# Altium PCB SAMD21_Base_Layout.PcbDoc
Units mm, origin at the board's own origin, x right, y up, seen from the top; angles counter-clockwise.
Board outline 152.4 x 101.6 mm, 2 copper layers (Top Layer, Bottom Layer); 27 components, 25 nets, 137 pads, 22 vias.
Unrouted connection lines stored in the file: 27.
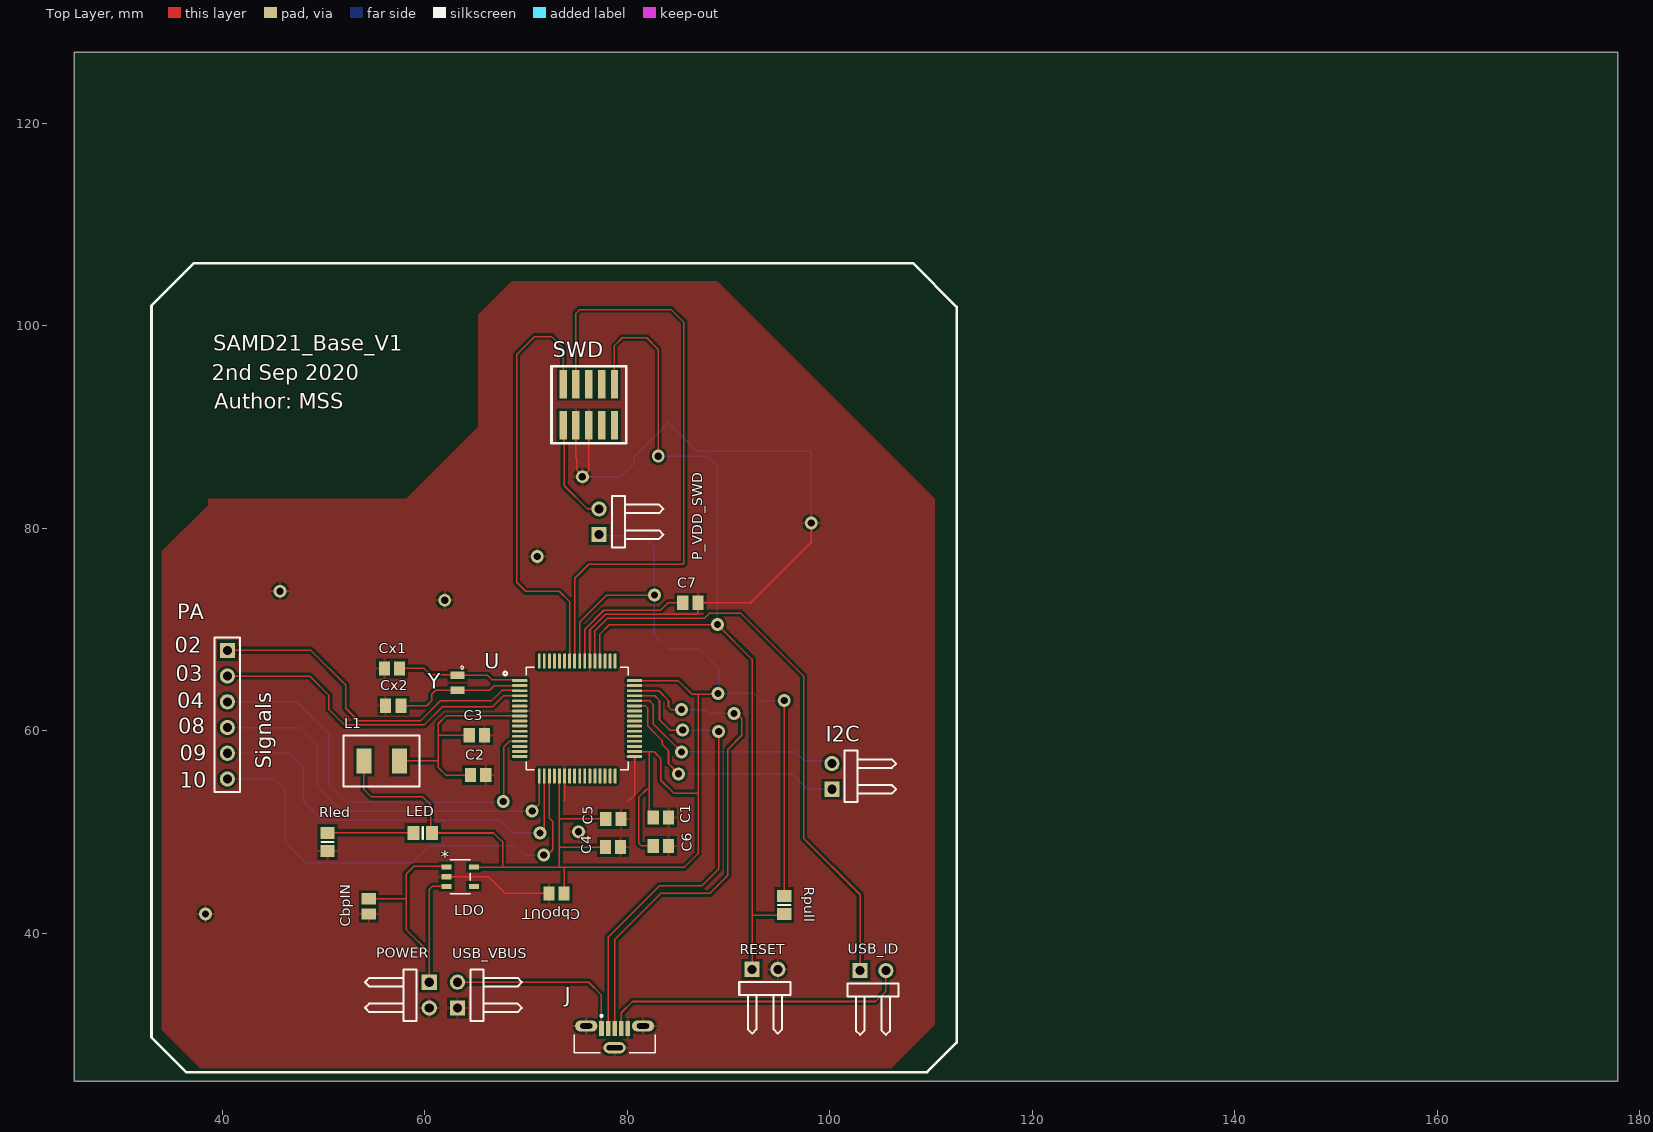
[diagram p0: Top Layer view]
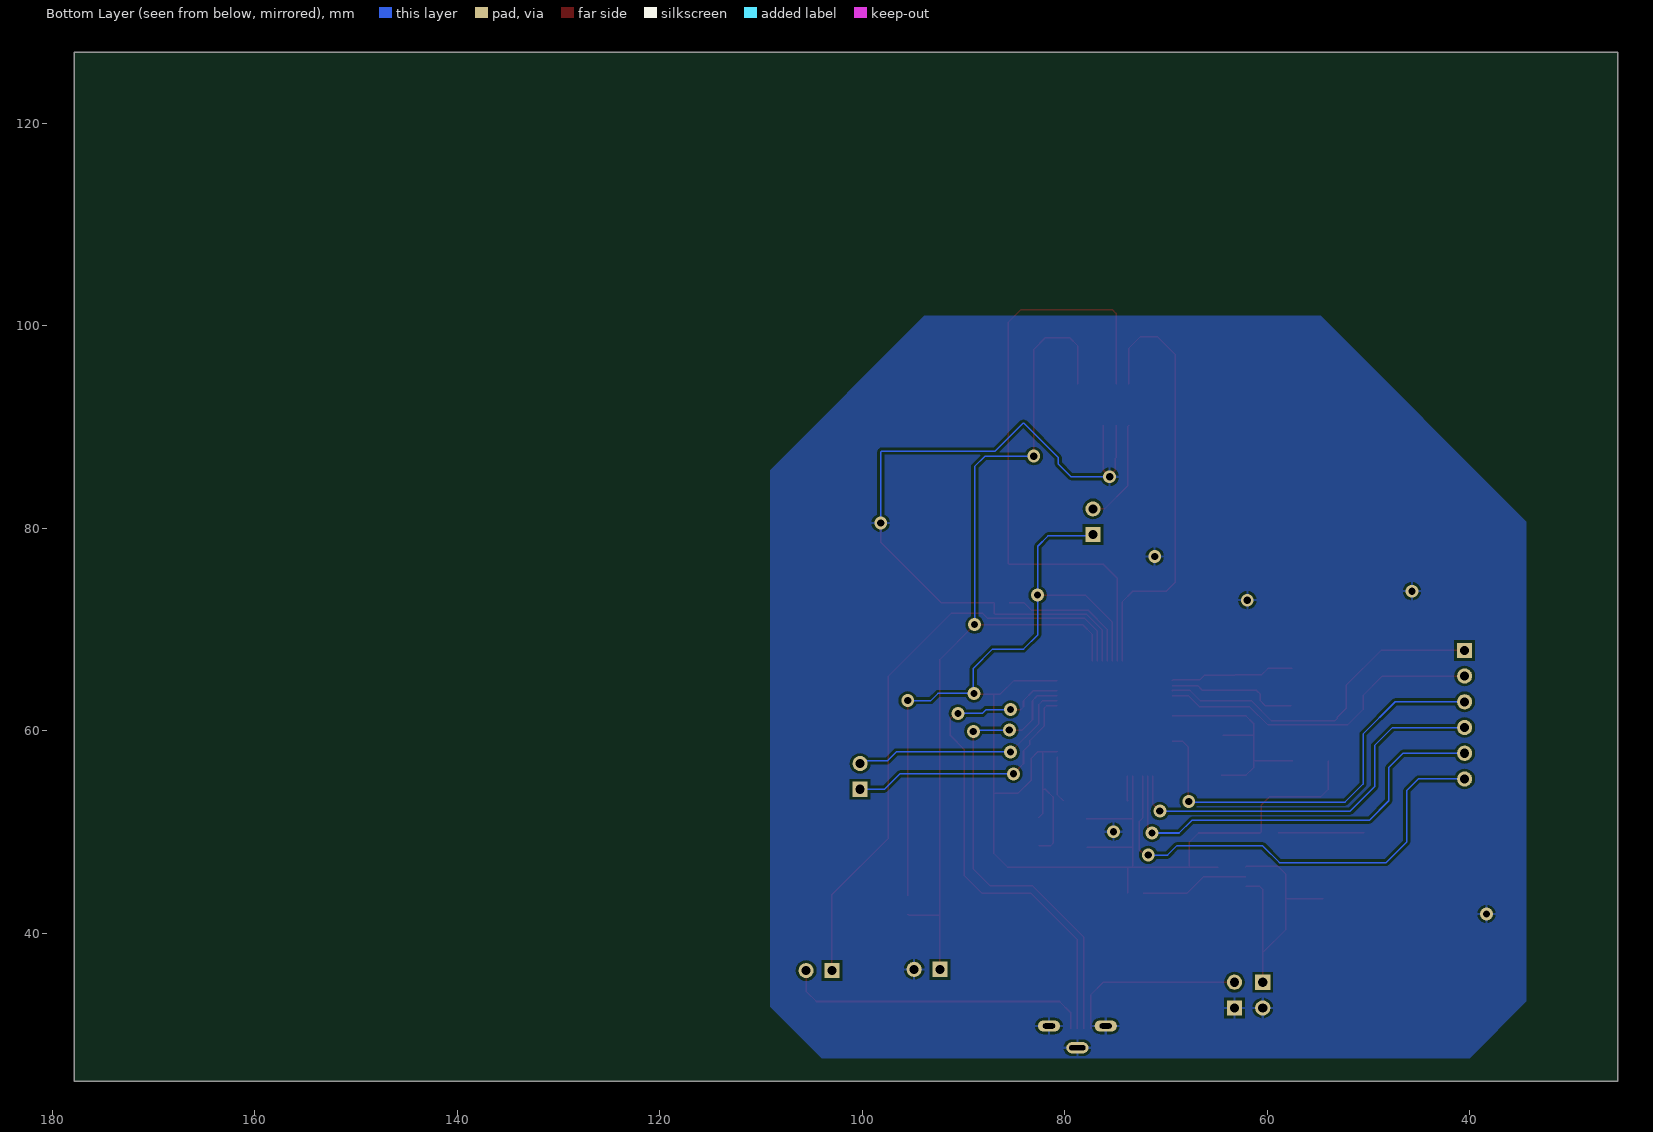
[diagram p1: Bottom Layer view, seen from below]

## Layer stack, top to bottom
Top Solder: solder mask 0.0102, Solder Resist, Dk 3.5
Top Layer: signal copper 0.0356
Dielectric 1: dielectric 0.32, FR-4, Dk 4.8
Bottom Layer: signal copper 0.0356
Bottom Solder: solder mask 0.0102, Solder Resist, Dk 3.5

## Board outline
25.4,25.4 177.8,25.4 177.8,127 25.4,127

## Design rules (kind name [scope] priority, off if disabled: settings)
Clearance [All] p1: gap=0.254 ignorepadtopadclearanceinfootprint=FALSE except(0: Arc-Hole Track-Hole SMDPad-Hole THPad-Hole Via-Hole Fill-Hole Poly-Hole Region-Hole Text-Hole)
PolygonConnect [All] p1: connectstyle=Relief reliefconductorwidth=0.254 reliefentries=4 polygonreliefangle="90 Angle" airgapwidth=0.254
RoomDefinition SAMD21_Base_schematic [InComponentClass('SAMD21_Base_schematic')] p1: confinementstyle=ConfineIn formatcopy=TRUE lockcomponents=FALSE outline 29.083,25.527 116.967,25.527 116.967,109.22 29.083,109.22
RoutingVias [All] p1: holewidth=0.711 width=1.27 viastyle="Through Hole" minholewidth=0.711 minwidth=1.27 maxholewidth=0.711 maxwidth=1.27
SolderMaskExpansion [All] p1: expansion=0.102 istentingtop=FALSE
Width [All] p1: maxlimit=0.254 minlimit=0.1 preferedwidth=0.254
30 further rules are at their usual default settings.

## Components (designator, comment, footprint, x,y, rotation, side; value= is the part's Value field where it differs from the comment)
C1 "Cap Pol3" C0805 83.324,51.435 r0 top value=10uF
C2 "Cap Pol3" C0805 65.278,55.626 r0 top value=100nF
C3 "Cap Pol3" C0805 65.151,59.563 r0 top value=10uF
C4 "Cap Pol3" C0805 78.601,48.514 r0 top value=100nF
C5 "Cap Pol3" C0805 78.625,51.308 r0 top value=100pF
C6 "Cap Pol3" C0805 83.312,48.641 r0 top value=100nF
C7 "Cap Pol3" C0805 86.233,72.644 r0 top value=1uF
CbpIN "Cap Pol3" C0805 54.483,42.672 r270 top value=1uF
CbpOUT "Cap Pol3" C0805 73.013,43.942 r180 top value=1uF
Cx1 "Cap Pol3" C0805 56.769,66.167 r180 top value=25pF
Cx2 "Cap Pol3" C0805 56.896,62.484 r180 top value=25pF
I2C "Header 2H" HDR1X2H 100.203,54.229 r90 top
J "1051330001" MOLEX_1051330001 78.755,30.857 r0 top
L1 "SRP4012TA-100M" Inductor 55.753,57.023 r180 top
LDO "AP2112K-3.3TRG1" SOT_RG1_DIO 63.5,45.593 r0 top
LED "Res Thermal" 6-0805_N 59.806,49.911 r180 top
P_VDD_SWD "Header 2H" HDR1X2H 77.216,79.375 r90 top
POWER "Header 2H" HDR1X2H 60.452,35.179 r270 top
RESET "Header 2H" HDR1X2H 92.329,36.449 r0 top
Rled "Res Thermal" 6-0805_N 50.408,49.022 r270 top
Rpull "Res Thermal" 6-0805_N 95.504,42.799 r270 top
Signals "Header 6" HDR1X6 40.513,67.945 r270 top
SWD "FTSH-105-01-XXX-DV-K" FTSH-105-01-XXX-DV-K 76.2,92.202 r0 top
U "ATSAMD21J18A-AU" QFP80P1600X1600X120-64N 75.057,61.214 r0 top
USB_ID "Header 2H" HDR1X2H 102.997,36.322 r0 top
USB_VBUS "Header 2H" HDR1X2H 63.246,32.639 r90 top
Y "ABS06-32.768KHZ-T" XTAL_ABS06-32.768KHZ-T 63.246,64.738 r270 top

## Footprints (in the part's own frame and the unit in brackets; to place one, negate y for a bottom-side part, rotate by r counter-clockwise, add the part's x,y. Pads: shape width x height; smd on the part's side, far side on the other; paste and mask are expansions set on the pad)
6-0805_N [mm] "Chip Resistor, Body 2.0x1.2mm, IPC Medium Density"
  rect 1.2x1.4 smd: 1(-0.9,0) 2(0.9,0)
  silkscreen extent 0,-0.6 0,0.6, body extent -1.07,-0.7 1.07,0.7, height 0.7
C0805 [mm] "Chip Capacitor, Body 2.0x1.3mm, IPC High Density"
  rect 1.1x1.4 smd: 1(-0.75,0) 2(0.75,0)
  body extent -1.1,-0.72 1.1,0.72, height 1.4
FTSH-105-01-XXX-DV-K [mil]
  rect 29x110 smd mask+2: 1(-100,-80) 2(-100,80) 3(-50,-80) 4(-50,80) 5(0,-80) 6(0,80) 7(50,-80) 8(50,80) 9(100,-80) 10(100,80)
  silkscreen extent -145,-150 145,150
HDR1X2H [mm] "Connector; Header; 2 Position; Right Angle"
  rect 1.5x1.5 hole 0.9: 1(0,0)
  round 1.5 hole 0.9: 2(2.54,0)
  silkscreen extent -1.27,-6.35 3.81,-1.27
HDR1X6 [mm] "Connector; Header; 6 Position"
  rect 1.5x1.5 hole 0.9: 1(0,0)
  round 1.5 hole 0.9: 2(2.54,0) 3(5.08,0) 4(7.62,0) 5(10.16,0) 6(12.7,0)
  silkscreen extent -1.27,-1.27 13.97,1.27
Inductor [mm]
  rect 1.5x2.5 smd: 1(-1.75,0) 2(1.75,0)
  silkscreen extent -3.75,-2.5 3.75,2.5
MOLEX_1051330001 [mm]
  rect 0.45x1.5 smd: 1(-1.3,-0.25) 2(-0.65,-0.25) 3(0,-0.25) 4(0.65,-0.25) 5(1.3,-0.25)
  oval 2.2x1.1 hole 0.5 slot 1.2 at 0 deg: S1(-2.8,0) S2(2.8,0)
  oval 2.2x1.1 hole 0.5 slot 1.6 at 0 deg: S3(0,-2.15)
  silkscreen extent -4,-2.65 4,1.1
QFP80P1600X1600X120-64N [mm]
  rrect50% 1.49x0.28 smd: 1(-5.67,3.75) 2(-5.67,3.25) 3(-5.67,2.75) 4(-5.67,2.25) 5(-5.67,1.75) 6(-5.67,1.25) 7(-5.67,0.75) 8(-5.67,0.25) 9(-5.67,-0.25) 10(-5.67,-0.75) 11(-5.67,-1.25) 12(-5.67,-1.75) 13(-5.67,-2.25) 14(-5.67,-2.75) 15(-5.67,-3.25) 16(-5.67,-3.75) 33(5.67,-3.75) 34(5.67,-3.25) 35(5.67,-2.75) 36(5.67,-2.25) 37(5.67,-1.75) 38(5.67,-1.25) 39(5.67,-0.75) 40(5.67,-0.25) 41(5.67,0.25) 42(5.67,0.75) 43(5.67,1.25) 44(5.67,1.75) 45(5.67,2.25) 46(5.67,2.75) 47(5.67,3.25) 48(5.67,3.75)
  rrect50% 0.28x1.49 smd: 17(-3.75,-5.67) 18(-3.25,-5.67) 19(-2.75,-5.67) 20(-2.25,-5.67) 21(-1.75,-5.67) 22(-1.25,-5.67) 23(-0.75,-5.67) 24(-0.25,-5.67) 25(0.25,-5.67) 26(0.75,-5.67) 27(1.25,-5.67) 28(1.75,-5.67) 29(2.25,-5.67) 30(2.75,-5.67) 31(3.25,-5.67) 32(3.75,-5.67) 49(3.75,5.67) 50(3.25,5.67) 51(2.75,5.67) 52(2.25,5.67) 53(1.75,5.67) 54(1.25,5.67) 55(0.75,5.67) 56(0.25,5.67) 57(-0.25,5.67) 58(-0.75,5.67) 59(-1.25,5.67) 60(-1.75,5.67) 61(-2.25,5.67) 62(-2.75,5.67) 63(-3.25,5.67) 64(-3.75,5.67)
  silkscreen extent -7.28,-5.05 5.05,5.05
SOT_RG1_DIO [mil]
  rect 39.5x20 smd paste+0 mask+0: 1(-53.25,37.4) 2(-53.25,0) 3(-53.25,-37.4) 4(53.25,-37.4) 5(53.25,37.4)
  silkscreen extent -38,-66 38,66, body extent 0,0 10,10, height 10
XTAL_ABS06-32.768KHZ-T [mm]
  rect 0.75x1.4 smd: 1(-0.73,0) 2(0.73,0)
  silkscreen extent -1.64,0.31 -1.36,0.59

## Part data
C1 C2 C3 C4 C5 C6 C7 CbpIN CbpOUT Cx1 Cx2: "Polarized Capacitor (Surface Mount)", LatestRevisionDate=29-May-2009, LatestRevisionNote="IPC-7351 Footprint Added.", PackageDescription="Chip Capacitor", PackageReference=C0805, Published=8-Jun-2000, Publisher="Altium Limited"
I2C P_VDD_SWD POWER RESET USB_ID USB_VBUS: "Header, 2-Pin, Right Angle", LatestRevisionDate=17-Jul-2002, LatestRevisionNote="Re-released for DXP Platform.", Publisher="Altium Limited"
J: "USB Connectors MICRO USB B RECPT VERTICAL", Package=None, Availability=Unavailable, MF=Molex, MP=105133-0001, Price=None, SnapEDA_Link=https://www.snapeda.com/parts/105133-0001/Molex/view-part/4775133/?ref=snap
L1: "Inductor"
LDO: "No Description Available", Built_By=EMA_Matt, Copyright="Copyright (C) 2018 Accelerated Designs. All rights reserved", Manufacturer_Part_Number=AP2112K-3.3TRG1, RefDes=RefDes, SourceLibrary=Diodes_Inc_2019-12-05, Type=DEV, Vendor="Diodes Inc"
LED Rled Rpull: "Thermistor", Code_IPC=RESC2012, LatestRevisionDate=29-May-2009, LatestRevisionNote="IPC-7351 Footprint Added.", PackageDescription="Chip Resistor 0805 Case Size", PackageReference=6-0805, PackageVersion=Mar-2003, Published=24-Mar-1999, Publisher="Altium Limited"
Signals: "Header, 6-Pin", LatestRevisionDate=17-Jul-2002, LatestRevisionNote="Re-released for DXP Platform.", Publisher="Altium Limited"
SWD: "TERMINAL STRIP, .050\"(1.27mm) PITCH, 10 PINS, KEYED", MANUFACTURER=SAMTEC, CREATED="November 30, 2016 - Wendy Xin", PCB DECAL=FTSH-105-01-XXX-DV-K
U: "ARMÂ® CortexÂ®-M0+ SAM D21J Microcontroller IC 32-Bit 48MHz 256KB _256K x 8_ FLASH 64-TQFP _10x10_", Package="TQFP-64 Microchip", Availability=Unavailable, MF=Microchip, MP=ATSAMD21J18A-AU, Price=None, SnapEDA_Link=https://www.snapeda.com/parts/ATSAMD21J18A-AU/Microchip/view-part/588919/?ref=snap
Y: "32.768kHz Â±20ppm Crystal 12.5pF 90 kOhms 2-SMD, No Lead", Package="SMD-2 Abracon", Availability=Unavailable, DigiKey-Purchase-URL=https://snapeda.com/shop?store=DigiKey&id=108994, MF=Abracon, MP=ABS06-32.768KHZ-T, Price=None, SnapEDA_Link=https://www.snapeda.com/parts/ABS06-32.768KHZ-T/Abracon%20LLC/view-part/108994/?ref=snap

## Via types
v1: diameter 1.27, hole 0.711, Top Layer to Bottom Layer, 22 vias

## Nets (pads, with @x,y where several pads share a name; then routed paths per layer and width w, separated by ;. In a path a pad name is that pad's centre, name@x,y a point inside that pad or via, vN(x,y) a via of type N, cw(c..) or ccw(c..) an arc to the next point about the centre after c; other vN are vias at no path point)
GND: C1.2 C2.2 C3.2 C4.2 C5.2 C6.2 C7.2 CbpIN.2 CbpOUT.2 Cx1.2 Cx2.2 J.5 J.S1 J.S2 J.S3 LDO.2 POWER.2 RESET.2 Rled.2 SWD.3 SWD.5 U.7 U.22 U.33 U.47 U.54 USB_VBUS.1 | length 93
  Top Layer w0.15: LDO.2 66.294,45.593 67.945,43.942 CbpOUT.2 ; 73.787,53.086 73.807,53.106 U.22 ; SWD.3 74.93,86.956 75.018,86.868 75.018,85.759 75.565,85.212 v1(75.565,85.09) 76.2,85.725 SWD.5 ; U.54 76.307,69.957 77.851,71.501 86.895,71.501 86.983,71.589 C7.2 92.202,72.644 98.171,78.613 v1(98.171,80.518) ; 80.137,53.086 80.727,53.676 U.33
  Bottom Layer w0.15: v1(75.565,85.09) 79.375,85.09 80.645,86.36 80.645,86.995 84.012,90.362 84.136,90.362 86.868,87.63 98.083,87.63 98.171,87.542 v1(98.171,80.518)
  other v1: 38.354,41.91 75.184,50.038 61.976,72.898 45.72,73.787 71.12,77.216
NetC2_1: C2.1 C3.1 L1.1 U.8 | length 23.1
  Top Layer w0.15: L1.1 61.341,57.023 ; C3.1 61.341,59.563 ; C2.1 62.103,55.626 61.341,56.388 61.341,57.023 ; U.8 69.383,61.468 62.103,61.468 61.341,60.706 61.341,59.563 ; 61.341,57.023 61.341,59.563
NetC7_1: C7.1 U.55 | length 13.9
  Top Layer w0.15: U.55 75.819,66.896 75.819,70.04 77.684,71.905 83.294,71.905 84.033,72.644 C7.1
NetCbpIN_1: CbpIN.1 LDO.1 LDO.3 POWER.1 | length 27.7
  Top Layer w0.15: CbpIN.1 58.166,43.422 ; POWER.1 60.452,38.1 ; LDO.3 60.772,44.643 60.452,44.323 60.452,38.1 ; LDO.1 62.081,46.609 58.928,46.609 58.166,45.847 58.166,43.422 ; 58.166,43.422 58.166,40.386 60.452,38.1
NetCx1_1: Cx1.1 U.1 Y.1 | length 12.4
  Top Layer w0.15: Cx1.1 59.944,66.167 60.579,65.532 63.182,65.532 Y.1 66.231,65.468 66.675,65.024 69.327,65.024 U.1
NetCx2_1: Cx2.1 U.2 Y.2 | length 12.9
  Top Layer w0.15: Cx2.1 60.198,62.484 60.706,62.992 60.706,63.627 61.087,64.008 Y.2 66.421,64.008 66.877,64.464 U.2
NetI2C_1: I2C.1 U.43 | length 25.5
  Top Layer w0.15: U.43 81.808,62.464 82.042,62.23 82.042,60.452 83.439,59.055 83.439,58.674 84.074,58.039 84.074,56.769 84.582,56.261 84.582,55.841 84.67,55.753 v1(85.07,55.753) v1@85.471,55.753
  Bottom Layer w0.15: v1(85.07,55.753) 96.266,55.753 97.79,54.229 I2C.1
NetI2C_2: I2C.2 U.44 | length 23.2
  Top Layer w0.15: U.44 82.197,62.964 82.55,62.611 82.55,60.706 v1(85.344,57.912)
  Bottom Layer w0.15: v1(85.344,57.912) 96.647,57.912 97.536,57.023 99.949,57.023 I2C.2
NetJ_1: J.1 USB_VBUS.2 | length 18
  Top Layer w0.15: USB_VBUS.2 76.2,35.179 77.455,33.924 J.1
NetJ_2: J.2 U.45 | length 47.4
  Top Layer w0.15: J.2 78.105,39.624 83.185,44.704 87.376,44.704 89.027,46.355 v1(89.027,59.944) v1@89.027,60.198 ; U.45 82.713,63.464 83.185,62.992 83.185,61.087 84.201,60.071 v1(85.471,60.071)
  Bottom Layer w0.15: v1(85.471,60.071) 88.9,60.071 v1(89.027,59.944)
NetJ_3: J.3 U.46 | length 50.8
  Top Layer w0.15: J.3 78.755,39.385 83.312,43.942 88.138,43.942 89.916,45.72 89.916,58.166 91.313,59.563 91.313,61.214 v1@90.551,61.976 ; U.46 83.102,63.964 84.074,62.992 84.074,62.357 84.328,62.103 v1(85.344,62.103)
  Bottom Layer w0.15: v1(85.344,62.103) 87.757,62.103 88.138,61.722 v1(90.551,61.722)
NetJ_4: J.4 USB_ID.2 | length 30.6
  Top Layer w0.15: J.4 79.405,32.161 80.518,33.274 104.521,33.274 105.537,34.29 USB_ID.2
NetLED_2: LED.2 Rled.1 | length 8.5
  Top Layer w0.15: Rled.1 58.895,49.922 LED.2
NetP_VDD_SWD_2: P_VDD_SWD.2 SWD.1 | length 10.4
  Top Layer w0.15: SWD.1 73.787,90.043 73.787,84.201 76.073,81.915 P_VDD_SWD.2
NetRESET_1: RESET.1 Rpull.2 SWD.10 U.52 | length 94.7
  Top Layer w0.15: U.52 77.307,69.56 78.232,70.485 v1(88.9,70.485) 92.329,67.056 92.329,41.783 ; SWD.10 78.74,98.044 79.502,98.806 81.915,98.806 83.058,97.663 v1(83.058,87.122) ; RESET.1 92.329,41.783 ; Rpull.2 95.388,41.783 92.329,41.783
  Bottom Layer w0.15: v1(83.058,87.122) 87.884,87.122 88.9,86.106 v1(88.9,70.485)
NetSignals_1: Signals.1 U.3 | length 34.4
  Top Layer w0.15: Signals.1 48.768,67.945 52.197,64.516 52.197,62.23 53.086,61.341 53.086,61.214 53.317,60.983 59.586,60.983 61.595,62.992 66.636,62.992 67.63,63.986 69.365,63.986 U.3
NetSignals_2: Signals.2 U.4 | length 32.9
  Top Layer w0.15: Signals.2 48.641,65.405 50.546,63.5 50.546,62.103 52.07,60.579 59.944,60.579 61.722,62.357 66.675,62.357 67.782,63.464 U.4
NetSignals_3: Signals.3 U.13 | length 41.5
  Top Layer w0.15: v1(67.754,53.034) 67.818,53.098 67.818,58.42 68.362,58.964 U.13
  Bottom Layer w0.15: Signals.3 47.371,62.865 50.546,59.69 50.546,54.737 52.324,52.959 67.679,52.959 v1(67.754,53.034)
NetSignals_4: Signals.4 U.17 | length 39.7
  Top Layer w0.15: v1(70.612,52.07) 71.307,52.765 U.17
  Bottom Layer w0.15: Signals.4 47.625,60.325 49.403,58.547 49.403,54.483 51.816,52.07 v1(70.612,52.07)
NetSignals_5: Signals.5 U.18 | length 41.9
  Top Layer w0.15: v1(71.374,49.911) 71.807,50.344 U.18
  Bottom Layer w0.15: Signals.5 46.609,57.785 48.006,56.388 48.006,53.086 49.911,51.181 67.437,51.181 68.707,49.911 v1(71.374,49.911)
NetSignals_6: Signals.6 U.19 | length 47.3
  Top Layer w0.15: v1(71.755,47.752) 72.136,47.752 72.644,48.26 72.644,51.054 72.307,51.391 U.19
  Bottom Layer w0.15: Signals.6 45.085,55.245 46.228,54.102 46.228,49.022 48.26,46.99 58.801,46.99 60.452,48.641 68.961,48.641 69.85,47.752 69.85,47.713 71.716,47.713 v1(71.755,47.752)
NetSWD_2: SWD.2 U.58 | length 43.7
  Top Layer w0.15: SWD.2 73.66,97.79 72.517,98.933 70.866,98.933 69.088,97.155 69.088,74.676 69.977,73.787 73.279,73.787 74.307,72.759 U.58
NetSWD_4: SWD.4 U.57 | length 61.7
  Top Layer w0.15: U.57 74.807,75.061 76.2,76.454 85.51,76.454 85.598,76.542 85.598,100.33 84.328,101.6 75.311,101.6 74.93,101.219 SWD.4
NetU_53: U.53 USB_ID.1 | length 58.3
  Top Layer w0.15: U.53 76.807,69.886 78.018,71.097 87.607,71.097 88.138,71.628 91.186,71.628 97.409,65.405 97.409,49.403 102.997,43.815 USB_ID.1
VCC: C1.1 C4.1 C5.1 C6.1 CbpOUT.1 L1.2 LDO.5 LED.1 P_VDD_SWD.1 Rpull.1 U.21 U.34 U.48 U.56 | length 177.5
  Top Layer w0.15: L1.2 54.003,54.201 54.737,53.467 59.817,53.467 60.579,52.705 60.579,50.038 LED.1 66.802,49.911 67.691,49.022 67.691,46.543 ; LDO.5 67.691,46.543 ; U.21 73.279,55.516 73.279,51.308 ; CbpOUT.1 73.763,46.519 73.787,46.543 ; U.56 75.307,70.735 77.978,73.406 v1(82.677,73.406) ; C4.1 73.406,48.514 73.279,48.641 ; C5.1 73.279,51.308 ; U.34 80.758,57.933 82.169,57.933 ; U.48 85.023,64.964 86.36,63.627 86.995,63.627 ; C6.1 81.407,48.641 81.153,48.895 81.153,53.467 81.915,54.229 82.169,54.229 ; C1.1 82.169,51.84 82.169,54.229 ; v1(88.963,63.691) 88.9,63.627 86.995,63.627 ; Rpull.1 v1(95.504,62.992) ; 67.691,46.543 73.279,46.543 ; 73.279,46.543 73.279,48.641 ; 73.279,46.543 73.787,46.543 ; 73.279,48.641 73.279,51.308 ; 73.787,46.543 85.659,46.543 86.995,47.879 86.995,53.848 ; 82.169,54.229 82.169,57.933 ; 82.169,57.933 82.656,57.933 83.312,57.277 83.312,55.118 84.582,53.848 86.995,53.848 ; 86.995,53.848 86.995,63.627
  Bottom Layer w0.15: P_VDD_SWD.1 77.343,79.248 81.661,79.248 82.677,78.232 v1(82.677,73.406) 82.677,69.469 84.074,68.072 87.122,68.072 89.027,66.167 89.027,63.754 v1(88.963,63.691) 92.519,63.691 93.218,62.992 v1(95.504,62.992)
pads on no net: LDO.4 SWD.6 SWD.7 SWD.8 SWD.9 U.5 U.6 U.9 U.10 U.11 U.12 U.14 U.15 U.16 U.20 U.23 U.24 U.25 U.26 U.27 U.28 U.29 U.30 U.31 U.32 U.35 U.36 U.37 U.38 U.39 U.40 U.41 U.42 U.49 U.50 U.51 U.59 U.60 U.61 U.62 U.63 U.64

## Polygon pours and split planes (outlines as drawn)
GND on Bottom Layer "GND_L02_P002" (solid, pour order 2): 34.417,80.645 54.737,100.965 93.853,100.965 109.093,85.725 109.093,32.766 104.013,27.686 40.005,27.686 34.417,33.274
GND on Top Layer "GND_L01_P003" (solid, remove dead copper, pour order 3): 34.036,77.724 38.608,82.296 38.608,82.931 58.166,82.931 65.278,90.043 65.278,101.092 68.58,104.394 88.9,104.394 110.363,82.931 110.363,30.988 106.045,26.67 37.846,26.67 34.036,30.48

## Other copper
Top Layer:
  pour cut-out: 46.99,46.863
  pour cut-out: 49.149,60.706

## Silkscreen, mask and mechanical layers (free items; w line width, h text height)
Top Overlay:
  lines w0.254: 33.02,29.718 33.02,29.972 33.02,30.734 33.02,101.981 37.211,106.172 108.204,106.172 112.522,101.854 112.522,29.21 109.601,26.289 36.449,26.289 33.02,29.718
  text "SAMD21_Base_V1" at 39.116,97.536 h1.52
  text "2nd Sep 2020" at 38.989,94.615 h1.52
  text "Author: MSS" at 39.243,91.821 h1.52
  text "PA" at 35.56,70.993 h1.52
  text "02" at 35.306,67.691 h1.52
  text "03" at 35.433,64.897 h1.52
  text "04" at 35.56,62.23 h1.52
  text "08" at 35.687,59.69 h1.52
  text "09" at 35.814,57.023 h1.52
  text "10" at 35.814,54.356 h1.52

## Text inside footprints (layer, text, board x,y; h text height)
LDO: Top Overlay "*" at 61.576,46.924 h1.27; Mechanical 13 "*" at 62.586,45.832 h1.27
SWD: Mechanical 1 "J1" at 75.765,91.758 h0.64